# EAGLE board v3.1 (EAGLE 9.4.2)
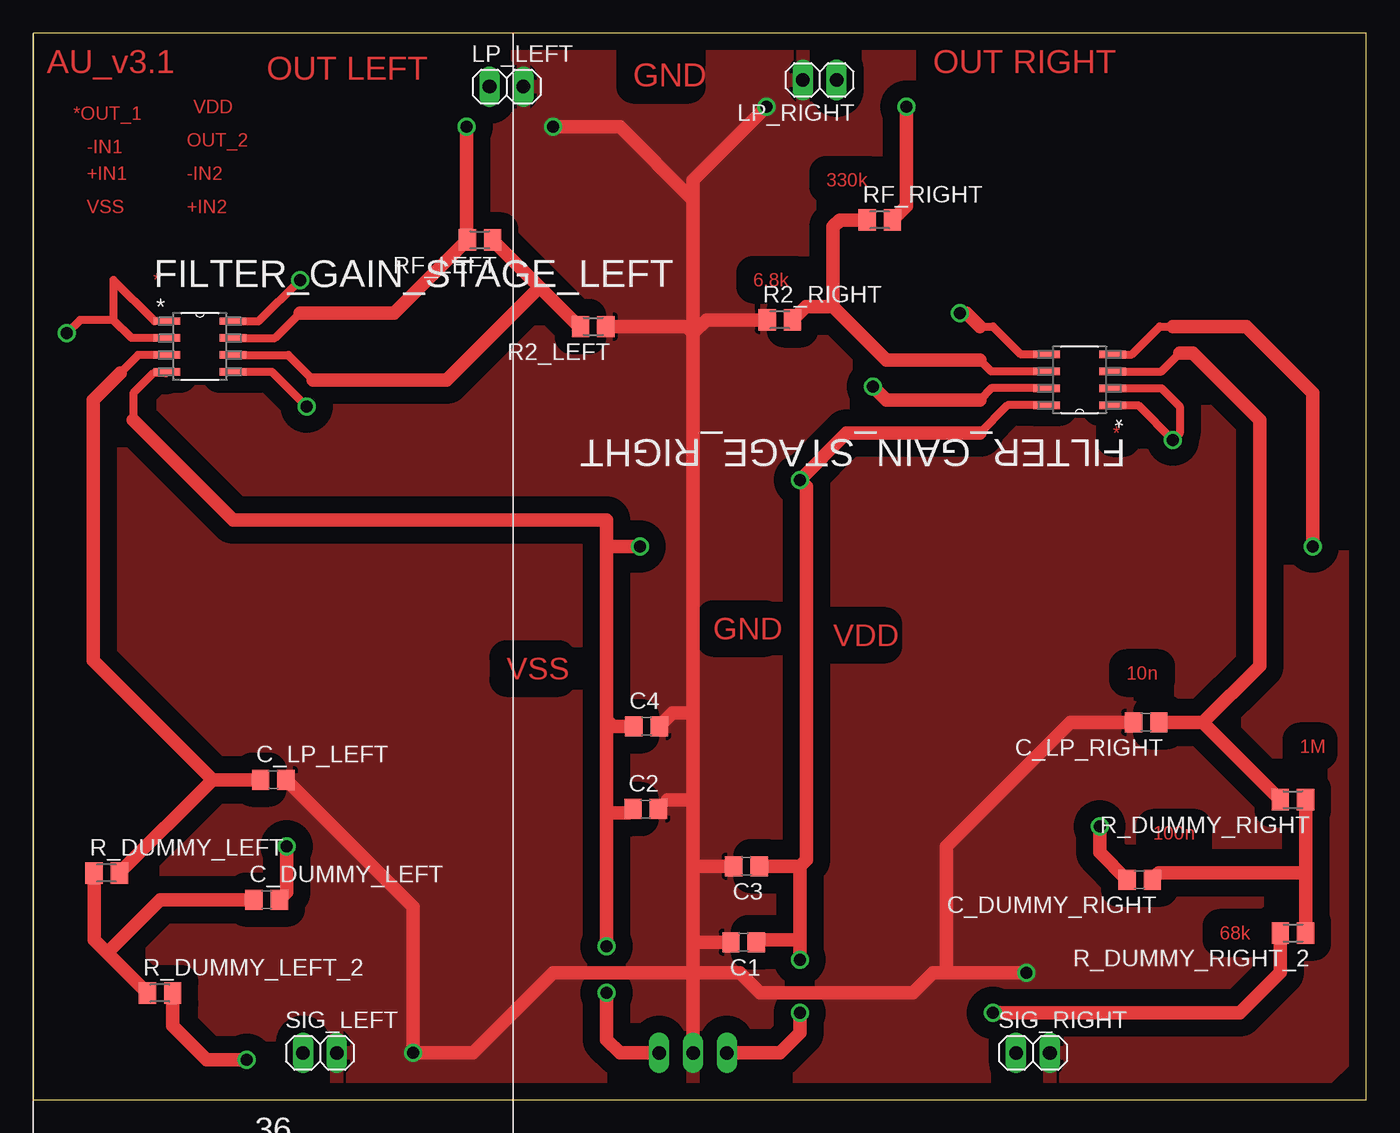
[diagram p0: board, top side]
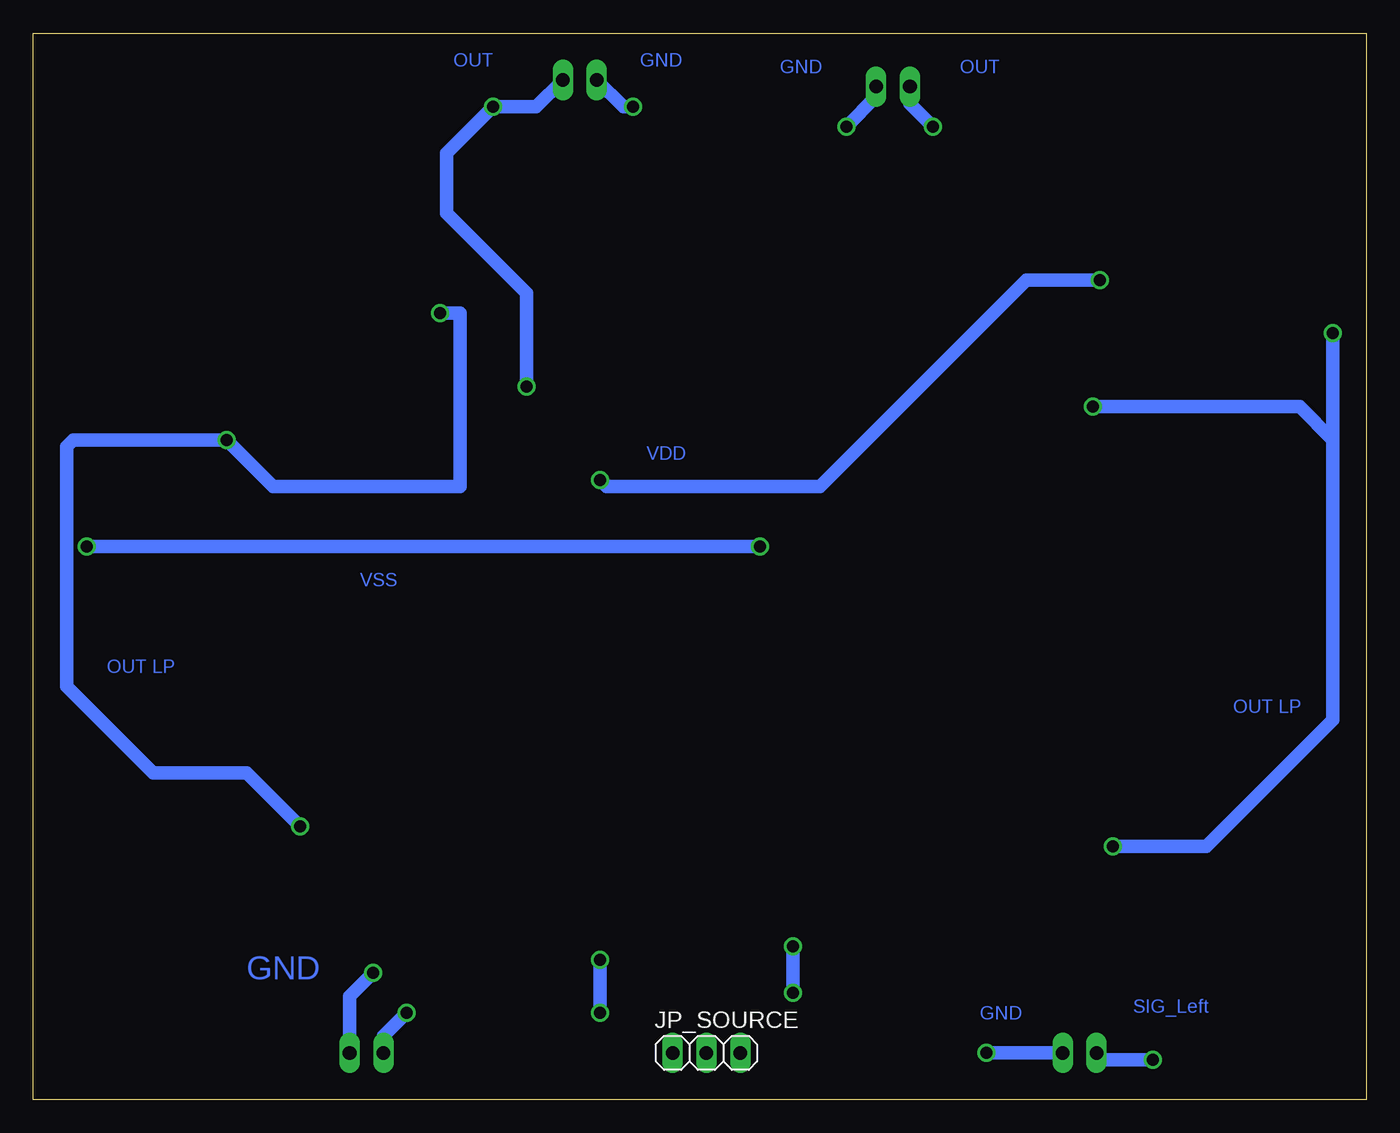
[diagram p1: board, bottom side, seen from below]

Size 100 x 80 mm. Coordinates in mm from the lower left corner, seen from the top.
Outline: 0,0 100,0 100,80 0,80 0,0
Copper layers (1*16): Top 0.035mm / dielectric 1.5mm / Bottom 0.035mm
Design rules "TM_medit_aetzen": minimum track width 10mil, minimum drill 8mil, track to track 10mil, track to pad 10mil, pad to pad 10mil, via to via 15mil, smd to smd 8mil, copper to edge 40mil, drill to drill 8mil, minimum pad ring 10mil, minimum via ring 8mil, stop-mask expansion 4mil, vias tented up to drill 0mil, thermal gap 10mil

## Footprints (pad centres in the part's own frame; a part is rotated, then mirrored left to right if it is on the bottom)
C0805 = smd 1.3 x 1.5: 1 -0.95,0; 2 0.95,0
SOIC127P600X175-8N = smd 1.981 x 0.559: 1 -2.464,1.905; 2 -2.464,0.635; 3 -2.464,-0.635; 4 -2.464,-1.905; 5 2.464,-1.905; 6 2.464,-0.635; 7 2.464,0.635; 8 2.464,1.905
1X03 = drill 1.016 long: 1 -2.54,0; 2 0,0; 3 2.54,0
1X02 = drill 1.016 long: 1 -1.27,0; 2 1.27,0
M0805 = smd 1.3 x 1.6: 1 -0.95,0; 2 0.95,0

## Placement (x,y rotation side)
C1  100n  [C0805]  53.29,11.8 180 top
C2  100n  [C0805]  45.94,21.8 0 top
C3  10u  [C0805]  53.5,17.5 180 top
C4  10u  [C0805]  46,28 0 top
C_DUMMY_LEFT  100n  [C0805]  17.5,15 0 top
C_DUMMY_RIGHT  100n  [C0805]  83,16.5 180 top
C_LP_LEFT  10n  [C0805]  18,24 0 top
C_LP_RIGHT  10n  [C0805]  83.49,28.3 180 top
FILTER_GAIN_STAGE_LEFT  ADA4004-2ARZ  [SOIC127P600X175-8N]  12.5,56.5 0 top
FILTER_GAIN_STAGE_RIGHT  ADA4004-2ARZ  [SOIC127P600X175-8N]  78.5,54 180 top
JP_SOURCE  [1X03]  49.5,3.5 0 bottom
LP_LEFT  [1X02]  35.5,76 0 top
LP_RIGHT  [1X02]  59,76.5 180 top
R2_LEFT  6.8k  [M0805]  42,58 180 top
R2_RIGHT  6.8k  [M0805]  56,58.5 0 top
R_DUMMY_LEFT  1M  [M0805]  5.5,17 0 top
R_DUMMY_LEFT_2  68k  [M0805]  9.5,8 0 top
R_DUMMY_RIGHT  1M  [M0805]  94.5,22.5 180 top
R_DUMMY_RIGHT_2  68k  [M0805]  94.5,12.5 180 top
RF_LEFT  330k  [M0805]  33.5,64.5 180 top
RF_RIGHT  330k  [M0805]  63.5,66 0 top
SIG_LEFT  [1X02]  21.5,3.5 0 top
SIG_RIGHT  [1X02]  75,3.5 0 top

## Library data of the parts
C1-C4 = resistor
C_DUMMY_LEFT C_DUMMY_RIGHT C_LP_LEFT C_LP_RIGHT = rcl; SPICEPREFIX: C
FILTER_GAIN_STAGE_LEFT FILTER_GAIN_STAGE_RIGHT = ADI-Phase-2; MPN: ADA4004-2ARZ; OC_FARNELL: 2077697; OC_NEWARK: 34P2953; PACKAGE: SOIC-8; SUPPLIER: Analog Devices
JP_SOURCE LP_LEFT LP_RIGHT SIG_LEFT SIG_RIGHT = pinhead
R2_LEFT R2_RIGHT R_DUMMY_LEFT R_DUMMY_LEFT_2 R_DUMMY_RIGHT R_DUMMY_RIGHT_2 RF_LEFT RF_RIGHT = rcl; SPICEPREFIX: R

## Nets
DUMMY_LEFT: C_DUMMY_LEFT.1 R_DUMMY_LEFT.1 R_DUMMY_LEFT_2.1
DUMMY_RIGHT: C_DUMMY_RIGHT.1 R_DUMMY_RIGHT.1 R_DUMMY_RIGHT_2.1
GND: C1.2 C2.2 C3.2 C4.2 C_LP_LEFT.2 C_LP_RIGHT.2 JP_SOURCE.2 LP_LEFT.2 LP_RIGHT.2 R2_LEFT.1 R2_RIGHT.1 SIG_LEFT.2 SIG_RIGHT.2
NEG_INP_NONINV_AMP_LEFT: FILTER_GAIN_STAGE_LEFT.6 R2_LEFT.2 RF_LEFT.1
NEG_INP_NONINV_AMP_RIGHT: FILTER_GAIN_STAGE_RIGHT.6 R2_RIGHT.2 RF_RIGHT.1
OUT_LP1_LEFT: C_DUMMY_LEFT.2 FILTER_GAIN_STAGE_LEFT.1 FILTER_GAIN_STAGE_LEFT.2 FILTER_GAIN_STAGE_LEFT.5
OUT_LP1_RIGHT: C_DUMMY_RIGHT.2 FILTER_GAIN_STAGE_RIGHT.1 FILTER_GAIN_STAGE_RIGHT.2 FILTER_GAIN_STAGE_RIGHT.5
OUT_NONINV_AMP_LEFT: FILTER_GAIN_STAGE_LEFT.7 LP_LEFT.1 RF_LEFT.2
OUT_NONINV_AMP_RIGHT: FILTER_GAIN_STAGE_RIGHT.7 LP_RIGHT.1 RF_RIGHT.2
POS_INP_LP1_LEFT: C_LP_LEFT.1 FILTER_GAIN_STAGE_LEFT.3 R_DUMMY_LEFT.2
POS_INP_LP1_RIGHT: C_LP_RIGHT.1 FILTER_GAIN_STAGE_RIGHT.3 R_DUMMY_RIGHT.2
SIG_LEFT: R_DUMMY_LEFT_2.2 SIG_LEFT.1
SIG_RIGHT: R_DUMMY_RIGHT_2.2 SIG_RIGHT.1
VDD: C1.1 C3.1 FILTER_GAIN_STAGE_LEFT.8 FILTER_GAIN_STAGE_RIGHT.8 JP_SOURCE.1
VSS: C2.1 C4.1 FILTER_GAIN_STAGE_LEFT.4 FILTER_GAIN_STAGE_RIGHT.4 JP_SOURCE.3

## Tracks (layer width: path | path; a pad name or v marks a point on that pad's centre or on a via)
DUMMY_LEFT
  Top 1.016: R_DUMMY_LEFT.1 4.55,12 5.53,11.03 | 5.53,11.03 R_DUMMY_LEFT_2.1 | 5.53,11.03 9.5,15 C_DUMMY_LEFT.1
DUMMY_RIGHT
  Top 1.016: R_DUMMY_RIGHT_2.1 95.45,17 | 95.45,17 R_DUMMY_RIGHT.1 | C_DUMMY_RIGHT.1 84.45,17 95.45,17
GND  (via drill 0.9)
  Top 0.61: C2.2 47.59,22.5
  Top 1.016: JP_SOURCE.2 49.5,9.5 | 49.5,9.5 49.5,12 | 49.5,12 49.5,17.5 | 49.5,17.5 49.5,22.5 | 49.5,22.5 49.5,29 | 49.5,29 49.5,57.5 | 49.5,67.5 49.5,57.5 | 49.5,9.5 39,9.5 33,3.5 v28.5,3.5 28.5,14.45 C_LP_LEFT.2 | 68.5,9.5 67.5,9.5 66,8 54.5,8 53,9.5 49.5,9.5 | 68.5,9.5 v74.5,9.5 | C3.2 49.5,17.5 | C1.2 49.7,11.8 49.5,12 | C4.2 47.95,29 49.5,29 | 47.59,22.5 49.5,22.5 | 68.5,9.5 68.5,19 77.8,28.3 C_LP_RIGHT.2 | R2_LEFT.1 49,58 49.5,57.5 | v39,73 44,73 49.5,67.5 | v55,74.5 49.5,69 49.5,67.5 | 49.5,57.5 50.5,58.5 R2_RIGHT.1
  Bottom 1.016: SIG_RIGHT.2 76.27,7.73 v74.5,9.5 | SIG_LEFT.2 v28.5,3.5 | LP_LEFT.2 36.77,75.23 v39,73 | LP_RIGHT.2 55.73,74.5 v55,74.5
  pour Top (isolate 1.27): 0,80 97,80 100,77 100,4.5 99.5,4 96,0.5 92.5,0.5 4,0.5 0.5,4 0.5,79.5
NEG_INP_NONINV_AMP_LEFT
  Top 0.61: FILTER_GAIN_STAGE_LEFT.6 19.14,55.87 21,54
  Top 1.016: RF_LEFT.1 37.98,60.98 | 37.98,60.98 40.95,58 R2_LEFT.2 | 37.98,60.98 31,54 21,54
NEG_INP_NONINV_AMP_RIGHT
  Top 0.61: FILTER_GAIN_STAGE_RIGHT.6 71.86,54.63 71,55.5
  Top 1.016: 60,59.5 60,65.5 60.5,66 RF_RIGHT.1 | 71,55.5 64,55.5 60,59.5 | R2_RIGHT.2 57.95,59.5 60,59.5
OUT_LP1_LEFT  (via drill 0.9)
  Top 0.61: FILTER_GAIN_STAGE_LEFT.1 9.1,58.41 6,61.5 6,58.5 | FILTER_GAIN_STAGE_LEFT.2 7.37,57.13 6,58.5 | v20.5,52 17.91,54.59 FILTER_GAIN_STAGE_LEFT.5 | 6,58.5 3.5,58.5 v2.5,57.5
  Top 1.016: v19,19 19,15.55 C_DUMMY_LEFT.2
  Bottom 1.016: v2.5,57.5 2.5,49.5 | 2.5,49.5 2.5,28.5 12,19 v19,19 | 2.5,49.5 5,52 v20.5,52
OUT_LP1_RIGHT  (via drill 0.9)
  Top 0.61: FILTER_GAIN_STAGE_RIGHT.2 84.64,53.37 86,52 86,50 v85.5,49.5 82.91,52.09 FILTER_GAIN_STAGE_RIGHT.1 | FILTER_GAIN_STAGE_RIGHT.5 74.09,55.91 72,58 71,58
  Top 1.016: C_DUMMY_RIGHT.2 80,18.55 v80,20.5 | v69.5,59 70,59 71,58
  Bottom 1.016: v80,20.5 84,24.5 91,24.5 97.5,31 97.5,49 97,49.5 v85.5,49.5 82,46 68,46 68,59 v69.5,59
OUT_NONINV_AMP_LEFT  (via drill 0.9)
  Top 0.61: FILTER_GAIN_STAGE_LEFT.7 18.14,57.13 20,59
  Top 1.016: 20,59 27.05,59 RF_LEFT.2 32.5,64.55 v32.5,73
  Bottom 1.016: LP_LEFT.1 34.23,74.73 v32.5,73
OUT_NONINV_AMP_RIGHT  (via drill 0.9)
  Top 0.61: FILTER_GAIN_STAGE_RIGHT.7 71.86,53.37 71,52.5
  Top 1.016: RF_RIGHT.2 65.5,67.05 v65.5,74.5 | 71,52.5 64,52.5 v63,53.5
  Bottom 1.016: LP_RIGHT.1 62.27,74.5 v65.5,74.5 69,71 69,66.5 63,60.5 v63,53.5
POS_INP_LP1_LEFT
  Top 0.61: FILTER_GAIN_STAGE_LEFT.3 7.87,55.87 6.5,54.5
  Top 1.016: R_DUMMY_LEFT.2 13.45,24 | 13.45,24 C_LP_LEFT.1 | 6.5,54.5 4.5,52.5 4.5,32.95 13.45,24
POS_INP_LP1_RIGHT
  Top 0.61: FILTER_GAIN_STAGE_RIGHT.3 84.64,54.63 86,56
  Top 1.016: C_LP_RIGHT.1 87.75,28.3 | 87.75,28.3 R_DUMMY_RIGHT.2 | 86,56 87,56 92,51 92,32.55 87.75,28.3
SIG_LEFT  (via drill 0.9)
  Top 1.016: v16,3 13,3 10.45,5.55 R_DUMMY_LEFT_2.2
  Bottom 1.016: SIG_LEFT.1 19.73,3 v16,3
SIG_RIGHT  (via drill 0.9)
  Top 1.016: R_DUMMY_RIGHT_2.2 93.55,9.55 90.5,6.5 v72,6.5
  Bottom 1.016: SIG_RIGHT.1 73.73,4.77 v72,6.5
VDD  (via drill 0.9)
  Top 0.61: FILTER_GAIN_STAGE_LEFT.8 16.91,58.41 v20,61.5 | FILTER_GAIN_STAGE_RIGHT.8 73.09,52.09 71,50
  Top 1.016: JP_SOURCE.1 56,3.5 57.5,5 v57.5,6.5 | 57.5,12 57.5,17.5 | C3.1 57.5,17.5 | C1.1 54.44,12 57.5,12 | 57.5,12 v57.5,10.5 | 71,50 61,50 v57.5,46.5 58,46 58,18 57.5,17.5
  Bottom 1.016: v57.5,46.5 57,46 41,46 25.5,61.5 v20,61.5 | v57.5,10.5 v57.5,6.5
VSS  (via drill 0.9)
  Top 0.61: FILTER_GAIN_STAGE_LEFT.4 9.94,54.5 9,54.5 7.5,53 7.5,51 | FILTER_GAIN_STAGE_RIGHT.4 82.41,55.91 84.5,58 85.5,58
  Top 1.016: v43,8 43,4.5 44,3.5 JP_SOURCE.3 | v43,11.5 43,21.5 | 43,21.5 43,28.5 | 43,28.5 43,41.5 | 43,41.5 43,43.5 15,43.5 7.5,51 | C2.1 44.69,21.5 43,21.5 | C4.1 43.5,28 43,28.5 | 85.5,58 91,58 96,53 v96,41.5 | v45.5,41.5 43,41.5
  Bottom 1.016: v43,8 v43,11.5 | v96,41.5 v45.5,41.5

## Text on the board
Top: AU_v3.1 | OUT RIGHT | OUT LEFT | GND | *OUT_1 | VDD | OUT_2 | -IN1 | +IN1 | -IN2 | 330k | VSS | +IN2 | * | 6.8k | * | GND | VDD | VSS | 10n | 1M | 100n | 68k
Bottom: GND | OUT | OUT | GND | VDD | VSS | OUT LP | OUT LP | GND | SIG_Left | GND